# EAGLE board Nixie_Board_Schematic (EAGLE 8.5.0)
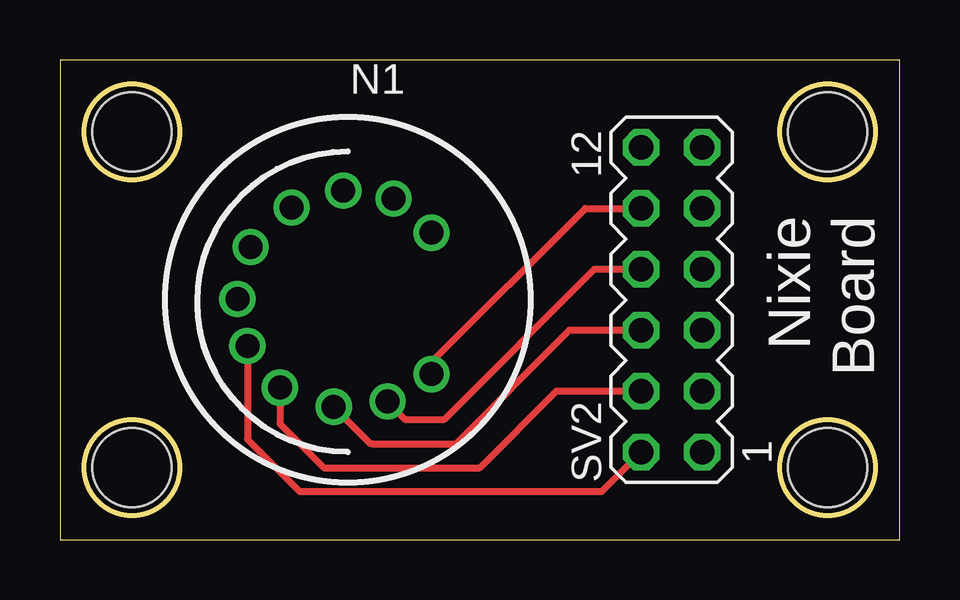
[diagram p0: board, top side]
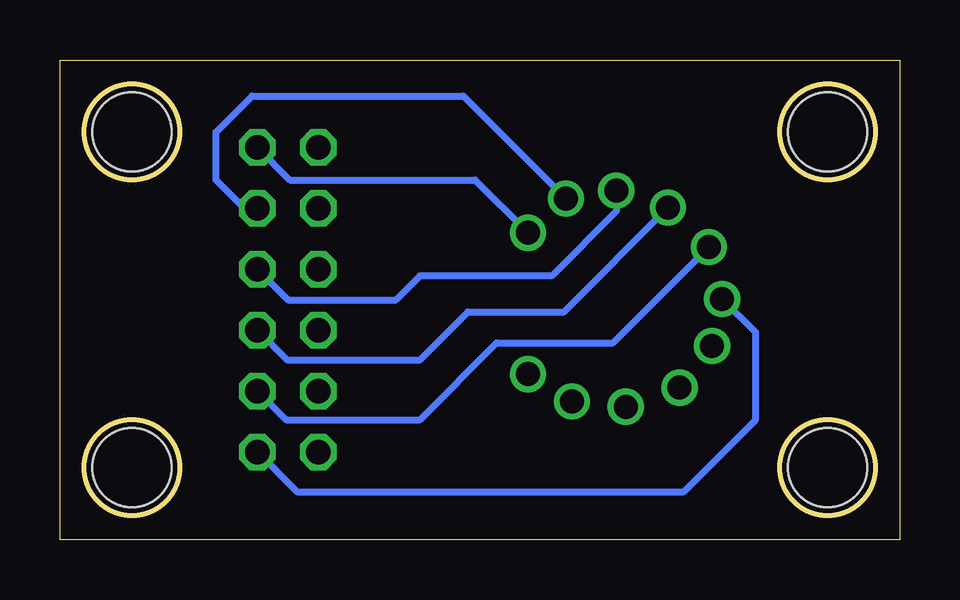
[diagram p1: board, bottom side, seen from below]

Size 35 x 20 mm. Coordinates in mm from the lower left corner, seen from the top.
Outline: 0,0 35,0 35,20 0,20 0,0
Outline: circle at 3,3 radius 2
Outline: circle at 3,17 radius 2
Outline: circle at 32,17 radius 2
Outline: circle at 32,3 radius 2
Copper layers (1*16): Top 0.035mm / dielectric 1.5mm / Bottom 0.035mm
Design rules "default *": minimum track width 6mil, minimum drill 0.35mm, track to track 0.5mm, track to pad 0.5mm, pad to pad 0.5mm, via to via 0.5mm, smd to smd 6mil, copper to edge 40mil, drill to drill 6mil, minimum pad ring 10mil, minimum via ring 8mil, stop-mask expansion 4mil, vias tented up to drill 0mil, thermal gap 10mil
Holes 3.3 mm at 3,3 32,3 32,17 3,17

## Footprints (pad centres in the part's own frame; a part is rotated, then mirrored left to right if it is on the bottom)
IN-8 = drill 1: 0 -4.244,-1.655; 1 2.792,-3.483; 2 4.222,-1.907; 3 4.556,0.189; 4 3.837,2.348; 5 2.203,4.052; 6 0.034,4.603; 7 -1.928,4.186; 8 -3.666,2.83; 9 -4.461,0.584; A -3.101,-3.49
MA06-2 = drill 1.016 octagon: 1 -6.35,-1.27; 2 -6.35,1.27; 3 -3.81,-1.27; 4 -3.81,1.27; 5 -1.27,-1.27; 6 -1.27,1.27; 7 1.27,-1.27; 8 1.27,1.27; 9 3.81,-1.27; 10 3.81,1.27; 11 6.35,-1.27; 12 6.35,1.27

## Placement (x,y rotation side)
N1  IN-8  [IN-8]  12,10 90 top
SV2  [MA06-2]  25.5,10 90 top

## Library data of the parts
N1 = russian-nixies
SV2 = con-lstb; OC_FARNELL: unknown; OC_NEWARK: unknown

## Nets
N$1: N1.1 SV2.11
N$2: N1.2 SV2.9
N$3: N1.3 SV2.7
N$4: N1.4 SV2.5
N$5: N1.5 SV2.3
N$6: N1.6 SV2.1
N$7: N1.7 SV2.2
N$8: N1.8 SV2.4
N$9: N1.9 SV2.6
N$10: N1.0 SV2.8
N$11: N1.A SV2.10

## Tracks (layer width: path | path; a pad name or v marks a point on that pad's centre or on a via)
N$1
  Bottom 0.3: N1.1 17.69,15 25.42,15 SV2.11
N$2
  Bottom 0.3: N1.2 18.18,18.5 27,18.5 28.5,17 28.5,15 27.31,13.81 SV2.9
N$3
  Bottom 0.3: SV2.7 25.5,10 21,10 20,11 14.5,11 11.81,13.69 N1.3
N$4
  Bottom 0.3: SV2.5 25.54,7.5 20,7.5 18,9.5 13.99,9.5 N1.4
N$5
  Bottom 0.3: SV2.3 25.58,5 20,5 16.8,8.2 11.95,8.2 N1.5
N$6
  Bottom 0.3: N1.6 6,8.64 6,5 9,2 25.12,2 SV2.1
N$7
  Top 0.3: N1.7 7.81,4.19 10,2 22.58,2 SV2.2
N$8
  Top 0.3: N1.8 9.17,4.83 11,3 17.5,3 20.69,6.19 SV2.4
N$9
  Top 0.2: 12.96,4 13,4
  Top 0.3: SV2.6 21.23,8.73 16.5,4 13,4 | N1.9 12.96,4
N$10
  Top 0.3: SV2.8 22.27,11.27 16,5 14.41,5 N1.0
N$11
  Top 0.3: SV2.10 21.9,13.81 15.49,7.4 N1.A

## Text on the board
tNames: Nixie / Board